# Altium PCB robotcar.PcbDoc (part 3 of 3)
Units mil, origin at the board's own origin, x right, y up, seen from the top; angles counter-clockwise.
Board outline 4050.03 x 1712.03 mil, 2 copper layers (Top Layer, Bottom Layer); 124 components, 123 nets, 485 pads, 136 vias.
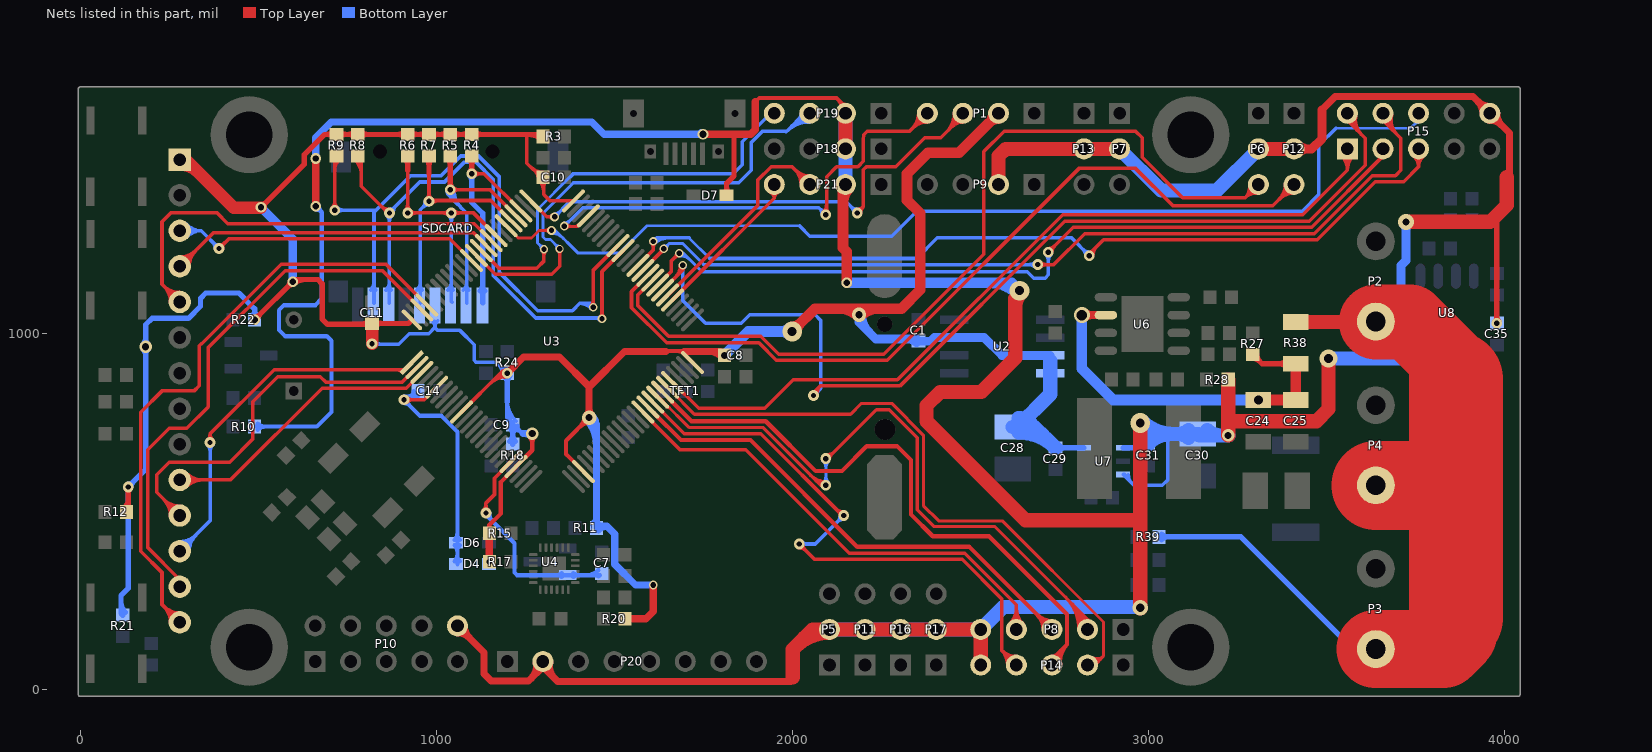
[diagram p3: the nets of this part, all layers, seen from the top]

## Via types
v1: diameter 30, hole 15, Top Layer to Bottom Layer, 73 vias
v2: diameter 23.62, hole 15, Top Layer to Bottom Layer, 11 vias
v3: diameter 35, hole 20, Top Layer to Bottom Layer, 8 vias
v4: diameter 24, hole 15, Top Layer to Bottom Layer, 7 vias
v5: diameter 25, hole 15, Top Layer to Bottom Layer, 7 vias
v6: diameter 30, hole 18, Top Layer to Bottom Layer, 6 vias
v7: diameter 45, hole 20, Top Layer to Bottom Layer, 4 vias
v8: diameter 55, hole 25, Top Layer to Bottom Layer, 4 vias
v9: diameter 43, hole 25, Top Layer to Bottom Layer, 3 vias
v10: diameter 40, hole 20, Top Layer to Bottom Layer, 3 vias
v11: diameter 23, hole 15, Top Layer to Bottom Layer, 3 vias
v12: diameter 32, hole 16, Top Layer to Bottom Layer, 1 vias
v13: diameter 30, hole 20, Top Layer to Bottom Layer, 1 vias
v14: diameter 50, hole 25, Top Layer to Bottom Layer, 1 vias
v15: diameter 27.56, hole 15, Top Layer to Bottom Layer, 1 vias
v16: diameter 25, hole 16, Top Layer to Bottom Layer, 1 vias
v17: diameter 45, hole 30, Top Layer to Bottom Layer, 1 vias
v18: diameter 30, hole 16, Top Layer to Bottom Layer, 1 vias

## Nets (pads, with @x,y where several pads share a name; then routed paths per layer and width w, separated by ;. In a path a pad name is that pad's centre, name@x,y a point inside that pad or via, vN(x,y) a via of type N, cw(c..) or ccw(c..) an arc to the next point about the centre after c; other vN are vias at no path point) (continued)
PC8: R8.2 SDCARD.7 U3.65 | length 1919.1
  Top Layer w10: R8.2@771.57,1490.59 cw(c727.09,1446.11) 790,1446.11 ; R8.2@778.65,1497.66 cw(c751.23,1470.25) 790,1470.25 ; R8.2@790,1490 790,1415 v1@863,1342 ; 845.1,1359.9 ccw(c869,1383.8) v1@869,1350 ; 854.76,1350.24 cw(c844.51,1340) v1@859,1340 ; v4@1461.05,1047.95 ccw(c1449.1,1059.9) 1466,1059.9 ccw(c1482.9,1059.9) v4@1470.95,1047.95 ; v4(1466,1043) 1466,1175.45 U3.65@1525.13,1234.58
  Bottom Layer w10: SDCARD.7@859.26,1123.03 ccw(c835.97,1146.32) 868.91,1146.32 ; v1@861.93,1332.93 cw(c845.08,1316.08) 868.91,1316.08 ; SDCARD.7@868.91,1086.93 v1@868.91,1331.09 ; 868.91,1136.44 ccw(c887.87,1136.44) SDCARD.7@874.46,1123.03 ; 868.91,1315.64 cw(c893.36,1315.64) v1@876.07,1332.93 ; v1@869,1350 ccw(c869,1369.31) 882.66,1355.66 ; v1@871,1337 871,1344 954,1427 1023.82,1427 1079.82,1483 1112,1483 1160,1435 1160,1165 1280,1045 v4@1460,1045 ; v1@879,1340 cw(c907.97,1340) 887.49,1360.49 ; 1444.27,1045 cw(c1444.27,1021.27) v4@1461.05,1038.05 ; 1453.93,1045 ccw(c1453.93,1055.07) v4@1461.05,1047.95
  other v1: 869,1340
PC9: R9.2 SDCARD.8 U3.66 | length 1991.4
  Top Layer w10: v1@707.93,1355.07 ccw(c690.86,1372.14) 715,1372.14 ccw(c739.14,1372.14) v1@722.07,1355.07 ; R9.2@709.61,1490.59 cw(c696.58,1477.57) 715,1477.57 ; v1(715,1348) R9.2@715,1495 ; 715,1458.18 cw(c760.84,1458.18) R9.2@728.43,1490.59 ; v4@1436.05,1079.95 ccw(c1424.1,1091.9) 1441,1091.9 ccw(c1457.9,1091.9) v4@1445.95,1079.95 ; v4(1441,1075) 1441,1178.29 U3.66@1511.21,1248.5
  Bottom Layer w10: v1(715,1348) 831,1348 ; v1@722.07,1340.93 cw(c739.14,1323.86) 739.14,1348 cw(c739.14,1372.14) v1@722.07,1355.07 ; SDCARD.8@815.83,1123.03 ccw(c792.54,1146.32) 825.48,1146.32 ; SDCARD.8@825.48,1086.93 825.48,1342.48 831,1348 ; 825.48,1136.44 ccw(c844.43,1136.44) SDCARD.8@831.03,1123.03 ; 1424.56,1086 cw(c1424.56,1062.1) v4@1443.36,1076.85 ; 1433,1086 1404,1086 ; v4@1435.49,1070.68 ccw(c1404,1045.98) 1404,1086 ; 831,1348 927,1444 1013,1444 1069,1500 1119.04,1500 1178,1441.04 1178,1172.9 1285.9,1065 1383,1065 1404,1086
PC10: R4.2 SDCARD.1 U3.78 | length 773.2
  Top Layer w10: v1(1100,1450) 1134.32,1450 U3.78@1238.39,1345.93 ; v1@1107.07,1442.93 cw(c1124.14,1425.86) 1124.14,1450 cw(c1124.14,1474.14) v1@1107.07,1457.07
  Top Layer w15: R4.2@1092.36,1492.36 cw(c1073.91,1473.91) 1100,1473.91 cw(c1126.09,1473.91) R4.2@1107.64,1492.36 ; v1@1094.7,1455.3 ccw(c1081.89,1468.11) 1100,1468.11 ccw(c1118.11,1468.11) v1@1105.3,1455.3 ; v1(1100,1450) R4.2@1100,1500
  Bottom Layer w15: v1@1094.7,1444.7 cw(c1081.89,1431.89) 1100,1431.89 cw(c1118.11,1431.89) v1@1105.3,1444.7 ; v1@1100,1445 1100,1370 1130.98,1339.02 SDCARD.1@1130.98,1086.93 ; SDCARD.1@1123.47,1120.98 ccw(c1105.34,1139.11) 1130.98,1139.11 ; 1130.98,1134.36 ccw(c1149.91,1134.36) SDCARD.1@1136.53,1120.98
PC11: R5.2 SDCARD.2 U3.79 | length 964.4
  Top Layer w10: v1(1040,1405) 1151.48,1405 U3.79@1224.47,1332.01 ; v1@1047.07,1397.93 cw(c1064.14,1380.86) 1064.14,1405 cw(c1064.14,1429.14) v1@1047.07,1412.07
  Top Layer w15: R5.2@1032.36,1492.36 cw(c1013.91,1473.91) 1040,1473.91 cw(c1066.09,1473.91) R5.2@1047.64,1492.36 ; v1@1034.7,1410.3 ccw(c1021.89,1423.11) 1040,1423.11 ccw(c1058.11,1423.11) v1@1045.3,1410.3 ; v1(1040,1405) R5.2@1040,1500
  Bottom Layer w10: v1@1030,1405 ccw(c1054.14,1405) 1037.07,1387.93 ; v1@1050,1405 ccw(c1122.43,1405) 1071.21,1353.79 ; 1054.14,1370.86 cw(c1088.28,1405) v1(1040,1405) 1040,1385 ; SDCARD.2@1076.41,1123.03 ccw(c1053.12,1146.32) 1086.06,1146.32 ; SDCARD.2@1086.06,1086.93 1086.06,1338.94 1040,1385 ; 1086.06,1136.44 ccw(c1105.02,1136.44) SDCARD.2@1091.61,1123.03 ; 1040,1385 cw(c1055,1385) 1046,1397 ccw(c1055,1385) 1040,1385 ; 1040,1385 ccw(c1025,1385) 1034,1397 cw(c1025,1385) 1040,1385
PC12: R7.2 SDCARD.5 U3.80 | length 882.7
  Top Layer w10: v1@972.93,1380.07 ccw(c955.86,1397.14) 980,1397.14 ccw(c1004.14,1397.14) 987.07,1380.07 ccw(c999.31,1392.31) 999.31,1375 ; v1(980,1373) 980,1450 ; v1@980,1375 1153.64,1375 U3.80@1210.55,1318.1 ; v1@987.07,1365.93 cw(c1008.97,1344.03) 1008.97,1375
  Top Layer w15: R7.2@972.36,1492.36 cw(c953.91,1473.91) 980,1473.91 cw(c1006.09,1473.91) R7.2@987.64,1492.36 ; 980,1450 R7.2@980,1500
  Bottom Layer w10: SDCARD.5@946.12,1123.03 ccw(c922.83,1146.32) 955.77,1146.32 ; SDCARD.5@955.77,1086.93 955.77,1348.77 v1(980,1373) v1@980,1383 ; 955.77,1136.44 ccw(c974.73,1136.44) SDCARD.5@961.32,1123.03 ; v1@970,1373 cw(c945.86,1373) 962.93,1355.93 cw(c980,1338.86) v1@980,1363
PD0: P15.6 U3.81 | length 2973
  Top Layer w8: U3.81@1196.63,1304.18 1230.81,1270 1268,1270 1289,1291 v5(1324,1291) ; v5@1317.99,1284.99 ccw(c1303.48,1270.48) 1303.48,1291 ccw(c1303.48,1311.52) v5@1317.99,1297.01
  Bottom Layer w8: v5@1324,1282.5 cw(c1324,1235.42) 1357.29,1268.71 ; v5@1324,1290.5 cw(c1324,1262.74) 1343.63,1282.37 ; v5(1324,1291) 1335,1291 1398,1228 1516,1228 1592,1304 2021,1304 ; 3528,1578 3738,1578 P15.6@3760,1600 ; 3750.56,1590.56 cw(c3760,1581.13) P15.6@3760,1594.47
  Bottom Layer w10: 2021,1304 2050,1275 2280,1275 2350,1345 3433.32,1345 3480,1391.68 3480,1530 3528,1578
PD2: R6.2 SDCARD.3 U3.83 | length 958
  Top Layer w10: v1@912.93,1347.07 ccw(c895.86,1364.14) 920,1364.14 ccw(c944.14,1364.14) 927.07,1347.07 ccw(c944.14,1364.14) 944.14,1340 ccw(c944.14,1315.86) v1@927.07,1332.93 ; 920,1460 v1(920,1340) 1105.13,1340 U3.83@1168.79,1276.34 ; v1@1035.93,1332.93 ccw(c1018.86,1315.86) 1018.86,1340 ccw(c1018.86,1364.14) v1@1035.93,1347.07 ; v1@1050.07,1332.93 cw(c1067.14,1315.86) 1067.14,1340 cw(c1067.14,1364.14) v1@1050.07,1347.07
  Top Layer w15: R6.2@912.36,1492.36 cw(c893.91,1473.91) 920,1473.91 cw(c946.09,1473.91) R6.2@927.64,1492.36 ; 920,1460 R6.2@920,1500
  Bottom Layer w10: SDCARD.3@1032.98,1123.03 ccw(c1008.79,1147.22) 1043,1147.22 ; v1@1035.93,1332.93 cw(c1018.86,1315.86) 1043,1315.86 cw(c1067.14,1315.86) v1@1050.07,1332.93 ; 1043,1135.54 ccw(c1060.69,1135.54) SDCARD.3@1048.18,1123.03 ; v1(1043,1340) 1043,1091.3 SDCARD.3@1045,1089.3
PD3: TFT1.5 U3.84 | length 1376.1
  Top Layer w10: TFT1.5@253.5,1090 ccw(c189.54,1090) 234.77,1135.23 ccw(c280,1180.46) TFT1.5@280,1116.5 ; TFT1.5@263.5,1090 ccw(c223.68,1090) 251.84,1118.16 ccw(c280,1146.32) TFT1.5@280,1106.5 ; TFT1.5@280,1090 230,1140 230,1315 255,1340 385,1340 415,1310 1107.29,1310 U3.84@1154.87,1262.42
PD4: TFT1.4 U3.85 | length 1078.5
  Top Layer w10: TFT1.4@280,1190 375,1285 1104.45,1285 U3.85@1140.95,1248.5 ; TFT1.4@280,1206.5 ccw(c280,1246.32) 308.16,1218.16 ccw(c336.32,1190) TFT1.4@296.5,1190 ; TFT1.4@280,1216.5 ccw(c280,1280.46) 325.23,1235.23 ccw(c370.46,1190) TFT1.4@306.5,1190
PD5: P19.4 U3.86 | length 1227.9
  Top Layer w10: U3.86@1127.03,1234.58 1176.61,1185 1283,1185 1303,1205 v2(1303,1238) ; v2@1298.18,1233.18 cw(c1286.56,1221.56) 1303,1221.56 cw(c1319.44,1221.56) v2@1307.82,1233.18
  Bottom Layer w8: v2@1295.19,1238 ccw(c1276.33,1238) 1289.67,1251.33 ccw(c1303,1264.67) v2@1303,1245.81 ; v2(1303,1238) 1285,1256 1285,1350 1377.02,1442.02
  Bottom Layer w10: 1377.02,1442.02 1377.49,1442.02 1384.52,1449.05 1384.52,1449.52 1385,1450 1835,1450 1860,1475 1860,1540 P19.4@1940,1620
  Bottom Layer w12: P19.4@1940,1620 P19.4@1950,1620
PD6: P19.3 U3.87 | length 1592.6
  Top Layer w10: U3.87@1113.11,1220.66 1165.77,1168 1325,1168 1347,1190 v11(1347,1239) ; v11@1342.4,1234.4 cw(c1331.31,1223.31) 1347,1223.31 cw(c1362.69,1223.31) v11@1351.6,1234.4
  Bottom Layer w8: v11@1339.5,1239 ccw(c1321.39,1239) 1334.2,1251.8 ccw(c1347,1264.61) v11@1347,1246.5 ; v11(1347,1239) 1321,1265 1307,1265 1300,1272 1300,1339 1386,1425
  Bottom Layer w10: 1386,1425 1850,1425 1885,1460 1885,1538.13 1916.87,1570 1985.06,1570 P19.3@2035.06,1620 ; 1982.62,1567.56 cw(c2050,1500.18) P19.3@2050,1595.47 ; 1999.69,1584.63 cw(c2050,1534.32) P19.3@2050,1605.47 ; 2016.76,1601.7 cw(c2050,1568.46) P19.3@2050,1615.47 ; 2018.7,1603.64 ccw(c2002.34,1620) P19.3@2025.47,1620
  Bottom Layer w12: P19.3@2035.06,1620 P19.3@2050,1620
PD7: TFT1.3 U3.88 | length 1100.3
  Top Layer w10: v1(390,1240) 418,1268 1037.93,1268 U3.88@1099.19,1206.74 ; v1@390,1250 ccw(c390,1274.14) 407.07,1257.07 ccw(c424.14,1240) v1@400,1240
  Bottom Layer w10: TFT1.3@280,1290 340,1290 ; TFT1.3@292.19,1278.89 cw(c317.35,1255.96) 317.35,1290 cw(c317.35,1324.04) TFT1.3@292.19,1301.11 ; TFT1.3@299.58,1272.15 cw(c340,1235.32) 340,1290 ; TFT1.3@299.58,1307.85 ccw(c340,1344.68) 340,1290 ; v1@380,1240 ccw(c355.86,1240) 372.93,1257.07 ccw(c390,1274.14) v1@390,1250 ; v1(390,1240) 340,1290
PD8: P21.4 U3.55 | length 484.9
  Top Layer w10: U3.55@1664.32,1095.38 1950,1381.06 ; P21.4@1939.41,1397.88 cw(c1931.36,1381.06) 1950,1381.06 ; P21.4@1950,1420 1950,1381.06 ; P21.4@1960.59,1397.88 ccw(c1968.64,1381.06) 1950,1381.06
PD9: P21.3 U3.56 | length 759.9
  Top Layer w10: U3.56@1650.4,1109.3 1652.37,1109.3 1904,1360.94 1904,1432.73 1941.27,1470 2000,1470 P21.3@2050,1420 ; P21.3@2025.47,1420 ccw(c1966.26,1420) 2008.13,1461.87 ccw(c2050,1503.74) P21.3@2050,1444.53 ; P21.3@2035.47,1420 ccw(c2000.4,1420) 2025.2,1444.8 ccw(c2050,1469.6) P21.3@2050,1434.53
PD10: P15.2 U3.57 | length 3122.2
  Top Layer w10: U3.57@1636.48,1123.22 1693,1179.74 ; 1672,1158.74 ccw(c1637.73,1193) v2@1686.19,1193 ; 1689.07,1175.81 ccw(c1671.88,1193) v2@1696.19,1193 ; v2@1689.03,1187.46 cw(c1683.5,1179.74) 1693,1179.74 ; v2(1693,1193) 1693,1179.74 ; v2@1696.97,1187.46 ccw(c1702.5,1179.74) 1693,1179.74 ; v1(2060,827) 2060,835 2079,854 ; v1@2069.94,828.12 cw(c2101.35,831.65) 2079,854 ; P15.2@3560,1600 3610,1550 3610,1473.97 3453.03,1317 2766.04,1317 2303.04,854 2079,854 ; P15.2@3564.42,1619.03 ccw(c3599.61,1611.33) 3574.14,1585.86 ; P15.2@3574.19,1616.89 ccw(c3620.82,1606.69) 3587.07,1572.93 ; P15.2@3583.96,1614.75 ccw(c3642.04,1602.04) 3600,1560
  Bottom Layer w10: v2@1688.18,1188.18 cw(c1676.56,1176.56) 1693,1176.56 cw(c1709.44,1176.56) v2@1697.82,1188.18 ; v2(1693,1193) 1693,1094 1757,1030 1857,1030 1881,1054 2065,1054 2080,1039 2080,847 v1(2060,827) ; v1@2060,837 ccw(c2060,861.14) 2077.07,844.07 ccw(c2094.14,827) v1@2070,827
PD11: P15.3 U3.58 | length 2502.4
  Top Layer w10: U3.58@1622.14,1137.14 U3.58@1622.56,1137.14 1661,1175.58 1661,1205 v2(1683,1227) ; v2@1676.19,1227 cw(c1659.75,1227) 1671.37,1215.37 cw(c1683,1203.75) v2@1683,1220.19 ; v1(2720,1230) 2790,1300 3460.07,1300 3660,1499.93 P15.3@3660,1500 ; v1@2720,1240 ccw(c2720,1264.14) 2737.07,1247.07 ccw(c2754.14,1230) v1@2730,1230
  Bottom Layer w8: v2@1682.87,1227.14 cw(c1688.86,1220.64) 1695.11,1226.89 ; v2@1683,1219.19 cw(c1683,1171.36) 1716.82,1205.18 ; v2(1683,1227) 1695,1227 ; v2@1683,1227.19 cw(c1683,1198.67) 1703.16,1218.84 ; v2@1688.3,1221.26 cw(c1694.51,1214.51) 1701,1221 ; v2@1690.14,1223.84 cw(c1695,1221.69) 1695,1227 ; v2@1690.14,1230.16 ccw(c1695,1232.31) 1695,1227 ; 1747,1175 1695,1227
  Bottom Layer w10: 1747,1175 2644,1175 2661,1175 2679,1157 2711,1157 2720,1166 v1(2720,1230) ; v1@2712.93,1222.93 cw(c2695.86,1205.86) 2720,1205.86 cw(c2744.14,1205.86) v1@2727.07,1222.93
PD12: P6.3 U3.59 | length 2564.3
  Top Layer w10: U3.59@1608.64,1151.06 1566,1108.42 1566,1081 1653.08,993.92 1912.12,993.92 1963.04,943 2257.68,943 2538.47,1223.79 2538.47,1512.47 2596,1570 2965,1570 2983.81,1551.19 2983.81,1496.19 3097,1383 3273,1383 ; P6.3@3285.57,1417.76 cw(c3242.21,1413.79) 3273,1383 ; P6.3@3295.53,1418.68 cw(c3269.85,1416.32) 3288.09,1398.09 cw(c3306.32,1379.85) P6.3@3308.68,1405.53 ; P6.3@3307.76,1395.57 ccw(c3303.79,1352.21) 3273,1383 ; P6.3@3310,1420 3273,1383
PD13: P12.3 U3.60 | length 2472
  Top Layer w10: U3.60@1594.72,1164.98 1549,1119.26 1549,1073.96 1647.96,975 1907,975 1956,926 2266.96,926 2805.96,1465 2965,1465 3070,1360 3350,1360 P12.3@3410,1420 ; P12.3@3385.47,1420 cw(c3326.26,1420) 3368.13,1378.13 cw(c3410,1336.26) P12.3@3410,1395.47 ; P12.3@3395.47,1420 cw(c3360.4,1420) 3385.2,1395.2 cw(c3410,1370.4) P12.3@3410,1405.47
PD14: P15.4 U3.61 | length 2730.1
  Top Layer w10: U3.61@1580.81,1178.9 v2@1640.45,1238.55 ; 1627.73,1225.83 ccw(c1614.56,1239) v2@1633.19,1239 ; 1629.92,1228.01 cw(c1640,1217.93) v2@1640,1232.19 ; v1(2690,1195) 2735,1195 2822,1282 3467,1282 3630,1445 3695,1445 3710,1460 3710,1550 P15.4@3660,1600 ; v1@2697.07,1187.93 cw(c2714.14,1170.86) 2714.14,1195 cw(c2714.14,1219.14) v1@2697.07,1202.07 ; P15.4@3664.42,1619.03 ccw(c3699.61,1611.33) 3674.14,1585.86 ; P15.4@3674.19,1616.89 ccw(c3720.82,1606.69) 3687.07,1572.93 ; P15.4@3683.96,1614.75 ccw(c3742.04,1602.04) 3700,1560
  Bottom Layer w8: v2(1640,1239) 1655,1254 1693,1254 1752,1195 ; v2@1640,1246.81 ccw(c1640,1265.67) 1653.33,1252.33 ccw(c1666.67,1239) v2@1647.81,1239
  Bottom Layer w10: 1752,1195 v1(2690,1195) ; v1@2682.93,1187.93 ccw(c2665.86,1170.86) 2665.86,1195 ccw(c2665.86,1219.14) v1@2682.93,1202.07
PD15: P15.5 U3.62 | length 2719
  Top Layer w10: U3.62@1566.89,1192.82 1610,1235.93 v2(1610,1260) ; v2@1605.18,1255.18 cw(c1593.56,1243.56) 1610,1243.56 cw(c1626.44,1243.56) v2@1614.82,1255.18 ; v1(2835,1220) 2835,1225 2875,1265 3475,1265 3638,1428 3718,1428 3760,1470 ; v1@2835,1230 ccw(c2835,1242.07) 2843.54,1233.54 ; v1@2845,1220 cw(c2881.21,1220) 2855.61,1245.61 ; P15.5@3744.99,1500.6 cw(c3721.31,1470) 3760,1470 ; P15.5@3751.11,1508.51 cw(c3737.08,1490.39) 3760,1490.39 cw(c3782.92,1490.39) P15.5@3768.89,1508.51 ; P15.5@3760,1500 3760,1470 ; P15.5@3775.01,1500.6 ccw(c3798.69,1470) 3760,1470
  Bottom Layer w8: 1710.82,1270 1768.82,1212
  Bottom Layer w10: v2@1607.75,1262.25 cw(c1626.44,1243.56) 1626.44,1270 ; v2(1610,1260) 1620,1270 1710.82,1270 ; v2@1614.82,1255.18 cw(c1650.59,1219.41) 1650.59,1270 ; 1768.82,1212 2350.08,1212 2408.08,1270 2785,1270 v1(2835,1220) ; v1@2825,1220 ccw(c2800.86,1220) 2817.93,1237.07 ccw(c2835,1254.14) v1@2835,1230
PE0: TFT1.14 U3.97 | length 1887.9
  Top Layer w10: TFT1.14@253.5,190 ccw(c189.54,190) 234.77,235.23 ccw(c280,280.46) TFT1.14@280,216.5 ; TFT1.14@263.5,190 ccw(c223.68,190) 251.84,218.16 ccw(c280,246.32) TFT1.14@280,206.5 ; TFT1.14@280,190 230,240 230,330 170,390 170,780 230,840 320,840 335,855 335,967 341,973 342.04,973 565.04,1196 859.39,1196 U3.97@973.92,1081.47
PE1: TFT1.13 U3.98 | length 1544.2
  Top Layer w10: TFT1.13@280,290 280,310 190,400 190,675 250,735 300,735 360,795 360,962 576,1178 849.55,1178 U3.98@960,1067.55
PE2: TFT1.12 U3.1 | length 1273.1
  Top Layer w10: v1@357.93,702.07 ccw(c340.86,719.14) 365,719.14 ccw(c389.14,719.14) v1@372.07,702.07 ; v1(365,695) 365,720 545,900 912.16,900 U3.1@932.16,920 ; 887.96,900 cw(c887.96,875.8) U3.1@905.07,892.91
  Bottom Layer w10: TFT1.12@280,390 365,475 v1(365,695) ; TFT1.12@280,406.5 ccw(c280,446.32) 308.16,418.16 ccw(c336.32,390) TFT1.12@296.5,390 ; TFT1.12@280,416.5 ccw(c280,480.46) 325.23,435.23 ccw(c370.46,390) TFT1.12@306.5,390 ; v1@357.93,687.93 cw(c340.86,670.86) 365,670.86 cw(c389.14,670.86) v1@372.07,687.93
PE3: TFT1.11 U3.2 | length 1234.7
  Top Layer w10: TFT1.11@253.5,490 ccw(c189.54,490) 234.77,535.23 ccw(c280,580.46) TFT1.11@280,516.5 ; TFT1.11@263.5,490 ccw(c223.68,490) 251.84,518.16 ccw(c280,546.32) TFT1.11@280,506.5 ; TFT1.11@280,490 215,555 215,605 250,640 420,640 485,705 485,810 555,880 674.96,880 689.96,865 905,865 U3.2@946.08,906.08
PE4: TFT1.10 U3.3 | length 968.2
  Top Layer w10: TFT1.10@280,590 421.82,590 679.82,848 915.84,848 U3.3@960,892.16 ; TFT1.10@291.66,578.34 cw(c319.82,550.18) 319.82,590 cw(c319.82,629.82) TFT1.10@291.66,601.66 ; TFT1.10@298.74,571.26 cw(c343.97,526.03) 343.97,590 cw(c343.97,653.97) TFT1.10@298.74,608.74
PE9: P8.4 U3.40 | length 1463.1
  Top Layer w10: U3.40@1600,760 1685,675 1766.82,675 1767.03,675.22 1869.78,675.22 2161,384 2485.04,384 2630,239.04 P8.4@2630,170 ; P8.4@2612.66,187.34 ccw(c2570.79,229.21) 2630,229.21 ccw(c2689.21,229.21) P8.4@2647.34,187.34 ; P8.4@2619.73,180.27 ccw(c2594.93,205.07) 2630,205.07 ccw(c2665.07,205.07) P8.4@2640.27,180.27
PE10: P8.3 U3.41 | length 1458.4
  Top Layer w12: U3.41@1612.5,777.5 1688,702 1883,702 2183,402 2498,402 P8.3@2730,170 ; P8.3@2706.47,170 ccw(c2649.67,170) 2689.84,210.16 ccw(c2730,250.33) P8.3@2730,193.53
PE11: P14.4 U3.42 | length 1960.2
  Top Layer w10: U3.42@1608.64,808.64 1697.29,720 1911.67,720 2141.67,490 v1(2145,490) ; v1@2020,400 cw(c2020,375.86) 2037.07,392.93 cw(c2054.14,410) v1@2030,410 ; v1(2020,410) 2063,367 2478,367 2588.47,256.53 2588.47,111.53 ; 2122.24,509.43 ccw(c2145,532.19) v1@2145,500 ; 2130.29,501.38 cw(c2118.91,490) v1@2135,490 ; P14.4@2605.47,70.14 ccw(c2547.44,70.49) 2588.47,111.53 ; P14.4@2615.47,70.09 ccw(c2581.1,70.29) 2605.4,94.6 ccw(c2629.71,118.9) P14.4@2629.91,84.53 ; P14.4@2629.86,94.53 cw(c2629.51,152.56) 2588.47,111.53 ; P14.4@2630,70 2588.47,111.53
  Bottom Layer w10: v1(2020,410) 2065,410 v1(2145,490) ; v1@2027.07,402.93 cw(c2044.14,385.86) 2044.14,410 cw(c2044.14,434.14) v1@2027.07,417.07 ; v1@2135,490 cw(c2110.86,490) 2127.93,472.93 cw(c2145,455.86) v1@2145,480
PE12: P8.2 U3.43 | length 2369.2
  Top Layer w9: U3.43@1622.56,822.56 1625.79,822.56 1638.75,809.6 1638.75,809 1710.25,737.5 1917.5,737.5 2080,575 v1(2095,575) ; U3.43@1649.01,794.71 cw(c1649.01,784.99) 1655.89,791.86 ; 2051.47,603.53 ccw(c2095,647.06) v1@2095,585.5 ; 2066.83,588.17 ccw(c2095,616.33) v1@2095,576.5 ; v1@2095,660.5 ccw(c2095,697.92) 2121.46,671.46 ; v1@2105,655 2237,787 2273,787 2351.5,708.5 2351.5,506.5 2399,459 2570,459 2830,199 P8.2@2830,170 ; v1@2105.5,650 cw(c2118.78,650) 2109.39,659.39 ; 2766.77,262.23 cw(c2674.54,170) P8.2@2804.97,170 ; 2782.13,246.87 cw(c2705.27,170) P8.2@2813.97,170 ; 2797.5,231.5 cw(c2735.99,170) P8.2@2822.97,170 ; 2812.86,216.14 cw(c2766.72,170) P8.2@2831.97,170 ; 2828.23,200.77 cw(c2797.45,170) P8.2@2840.97,170
  Bottom Layer w9: v1@2087.58,582.42 ccw(c2069.65,600.35) 2095,600.35 ccw(c2120.35,600.35) v1@2102.42,582.42 ; v1@2087.58,642.58 cw(c2069.65,624.65) 2095,624.65 cw(c2120.35,624.65) v1@2102.42,642.58 ; v1(2095,575) v1(2095,650)
PE13: P14.3 U3.44 | length 1792.7
  Top Layer w12: U3.44@1656.25,816.25 1717.5,755 1926.25,755 2066.25,615 2140,615 2210,685 2295,685 2334,646 2334,493 2395,432 2553,432 2772.53,212.47 2772.53,127.47 2730,84.94 P14.3@2730,70 ; P14.3@2730,93.53 ccw(c2730,114.25) 2744.65,99.6 ; P14.3@2741.45,71.3 cw(c2788.18,76.62) 2754.93,109.87 ; P14.3@2753.38,72.66 cw(c2819.79,80.21) 2772.52,127.47
PE14: P14.2 U3.45 | length 1878.9
  Top Layer w9: U3.45@1660,840 1725.5,774.5 2164.5,774.5 2195,805 2280,805 2369,716 2369,518 2412,475 2591,475 2875,191 2875,95 ; P14.2@2830,70 2850,70 2875,95 ; P14.2@2833.69,75.98 ccw(c2844.45,93.38) 2858.92,78.92 ; P14.2@2838.43,83.63 ccw(c2850.59,103.32) 2866.96,86.96 ; P14.2@2843.16,91.29 ccw(c2856.73,113.26) 2875,95 ; P14.2@2855.03,70 cw(c2867.17,70) 2858.58,78.58
PE15: P15.1 U3.46 | length 2391.3
  Top Layer w10: U3.46@1664.32,864.32 1737.64,791 1923.08,791 2003.08,871 2296,871 2760,1335 3205,1335 3435,1335 3560,1460 P15.1@3560,1500 ; P15.1@3542.66,1502.66 cw(c3500.79,1460.79) 3560,1460.79 cw(c3619.21,1460.79) P15.1@3577.34,1502.66 ; P15.1@3549.73,1509.73 cw(c3524.93,1484.93) 3560,1484.93 cw(c3595.07,1484.93) P15.1@3570.27,1509.73
SWCLK: P1.3 U3.76 | length 1694.4
  Top Layer w10: U3.76@1266.23,1373.77 1311,1329 v5(1333,1329) ; v5@1327.7,1323.7 ccw(c1314.89,1310.89) 1314.89,1329 ccw(c1314.89,1347.11) v5@1327.7,1334.3 ; v1(2183,1340) 2200,1357 ; v1@2183.03,1350 ccw(c2183.1,1373.9) 2200,1357 ; v1@2193,1340.03 cw(c2216.9,1340.1) 2200,1357 ; 2433.18,1566.18 ccw(c2379.36,1620) P1.3@2455.47,1620 ; 2450.08,1583.08 cw(c2480,1553.16) P1.3@2480,1595.47 ; 2450.25,1583.25 ccw(c2413.5,1620) P1.3@2465.47,1620 ; P1.3@2480,1620 2480,1613 2418,1551 2372.47,1551 2291.47,1470 2209.04,1470 2200,1460.96 2200,1357
  Bottom Layer w10: v5(1333,1329) 1376,1372 2151,1372 2171.5,1351.5 ; v5@1333,1336.5 ccw(c1333,1354.61) 1345.8,1341.8 ccw(c1358.61,1329) v5@1340.5,1329 ; v1@2173,1340 ccw(c2148.86,1340) 2165.93,1357.07 ccw(c2183,1374.14) v1@2183,1350
SWDIO: P1.4 U3.72 | length 1650.2
  Top Layer w8: v5@1360,1302 1397.68,1302 U3.72@1427.69,1332.01 ; v5@1366.01,1296.99 cw(c1378.11,1284.89) 1378.11,1302 ; v5@1366.01,1309.01 ccw(c1382.93,1325.94) 1382.93,1302 ; 1388.03,1302 ccw(c1388.03,1318.78) U3.72@1399.9,1306.91
  Top Layer w10: v1@2087.93,1342.07 ccw(c2065.75,1364.25) 2097.12,1364.25 ; v1(2095,1335) 2097.12,1337.12 2097.12,1442.12 2125,1470 2185,1470 2200,1485 2200,1546.03 2201,1559.89 2211.1,1570 2330,1570 P1.4@2380,1620 ; 2097.12,1354.03 ccw(c2114.03,1354.03) v1@2102.07,1342.07 ; P1.4@2355.47,1620 cw(c2296.26,1620) 2338.13,1578.13 cw(c2380,1536.26) P1.4@2380,1595.47 ; P1.4@2365.47,1620 cw(c2330.4,1620) 2355.2,1595.2 cw(c2380,1570.4) P1.4@2380,1605.47
  Bottom Layer w10: v5(1360,1303) 1412,1355 2075,1355 v1(2095,1335) ; v5@1360,1310.5 ccw(c1360,1328.61) 1372.8,1315.8 ccw(c1385.61,1303) v5@1367.5,1303 ; v1@2085,1335 ccw(c2060.86,1335) 2077.93,1352.07 ccw(c2095,1369.14) v1@2095,1345
VBAT: C14.2 D4.2 D6.2 U3.6 | length 1017.7
  Top Layer w10: v1(910,815) 966.36,815 U3.6@1001.76,850.4 ; v1@917.07,807.93 cw(c934.14,790.86) 934.14,815 cw(c934.14,839.14) v1@917.07,822.07
  Bottom Layer w12: v1@909.95,812 ccw(c910.4,839.24) 929.66,819.98 ; v1@910,806 cw(c910,784.27) 925.36,799.64 cw(c940.73,815) v1@919,815 ; v1@910.15,824 ccw(c911.04,878.64) C14.2@949.68,840 924.68,815 v1(910,815) 955,770 1015,770 1060,725 D4.2@1060,353 ; 927,817.31 cw(c949.68,794.62) C14.2@949.68,826.71 ; 929.37,819.69 ccw(c910.04,839.02) C14.2@937.38,839.02 ; D4.2@1051.58,361.31 ccw(c1031.25,381.64) 1060,381.64 ; D6.2@1051.58,406.69 cw(c1031.25,386.36) 1060,386.36 ; D6.2@1051.58,421.31 ccw(c1031.25,441.64) 1060,441.64 ; 1060,376.28 ccw(c1081.17,376.28) D4.2@1066.2,361.31 ; 1060,391.72 cw(c1081.17,391.72) D6.2@1066.2,406.69 ; 1060,436.28 ccw(c1081.17,436.28) D6.2@1066.2,421.31
VCC3V3: C1.1 C8.1 C9.1 C10.1 C11.1 C28.1 C29.2 D4.1 P1.2 R3.1 R4.1 R5.1 R6.1 R7.1 R8.1 R9.1 R11.1 R12.2 R15.1 R17.1 R18.1 R20.2 R21.2 R22.2 R24.2 SDCARD.4 TFT1.1 U2.3 U2.7 U2.8 U3.11 U3.22 U3.28 U3.50 U3.75 U3.100 U7.5 | length 12488.5
  Top Layer w10: U3.11@1071.36,780.81 1180.23,889.68 ; 1149.19,858.64 cw(c1200,807.82) v1@1200,879.68 ; 1166.26,875.71 cw(c1200,841.97) v1(1200,889.68) ; 1170.35,879.8 cw(c1183.28,866.88) v1@1194.09,881.62 ; 1178.6,888.05 cw(c1190.25,876.39) v1(1200,889.68) ; 1183.33,892.78 cw(c1200,876.11) v1@1200,899.68 ; v1@1191.94,883.76 ccw(c1180.24,875.15) 1180.24,889.68 ; v1@1191.94,895.61 cw(c1180.24,904.22) 1180.24,889.68 ; 1255,1560.63 1255,1480 1295,1440 C10.1@1299.68,1440 ; 1267.29,1467.71 ccw(c1299.68,1500.1) C10.1@1299.68,1454.29 ; 1280.98,1454.02 cw(c1267.94,1440.98) C10.1@1286.38,1440.98 ; C10.1@1290.28,1429.61 cw(c1261.97,1401.3) 1302,1401.3 ; 1302,1412.48 cw(c1326.22,1412.48) C10.1@1309.09,1429.61 ; C10.1@1309.68,1440 1302,1432.31 1302,1392 1320.23,1373.77 U3.75@1385.93,1373.77 ; 1180.23,889.68 v1(1200,889.68)
  Top Layer w12: R15.1@1142.86,451.22 ccw(c1134.78,463.34) 1149.34,463.34 ; R15.1@1149.34,440 1149.34,463.34 ; R15.1@1156.02,451.54 cw(c1163.1,463.34) 1149.34,463.34 ; U3.22@1224.47,627.69 1270,673.22 v3(1270,720) ; U3.22@1224.47,628.8 1224.47,626.59 1182,584.12 1182,496 1149.34,463.34 ; v3@1261.87,711.87 cw(c1242.24,692.24) 1270,692.24 cw(c1297.76,692.24) v3@1278.13,711.87 ; U3.28@1413.77,613.77 1365,662.55 1365,700 v10(1430,765) ; v10@1416,765 cw(c1382.2,765) 1406.1,741.1 cw(c1430,717.2) v10@1430,751 ; 1647,952 1688,952 U3.50@1720,920 ; 1680.37,952 cw(c1680.37,933.27) U3.50@1693.62,946.51
  Top Layer w15: R12.2@122.67,508.63 ccw(c92.91,538.39) 135,538.39 ; v1@129.7,564.7 cw(c116.89,551.89) 135,551.89 cw(c153.11,551.89) v1@140.3,564.7 ; R12.2@135,504.68 v1(135,570) ; v6(490.32,1040) 603.32,1153 668,1153 680,1141 680,1042 695,1027 817.32,1027 C11.1@820,1029.69 922.14,1029.69 U3.100@931.65,1039.2 ; v6@490.32,1047.5 ccw(c490.32,1065.61) 503.12,1052.8 ccw(c515.92,1040) v6@497.82,1040 ; v6@508,1355 630,1477 630,1504 686.63,1560.63 R3.1@1296,1560.63 ; v6@508,1363.5 ccw(c508,1384.02) 522.51,1369.51 ; v6@515.5,1356 cw(c531.19,1356) 520.1,1367.1 ; v6@589.88,1147.06 cw(c571.77,1147.06) 584.58,1134.26 cw(c597.38,1121.46) v6@597.38,1139.56 ; v6@602.68,1141.76 cw(c629.82,1114.63) 629.82,1153 ; R9.1@711.37,1552.99 ccw(c692.93,1534.54) 692.93,1560.63 ccw(c692.93,1586.72) R9.1@711.37,1568.27 ; R9.1@728.63,1552.99 cw(c747.07,1534.54) 747.07,1560.63 cw(c747.07,1586.72) R9.1@728.63,1568.27 ; R8.1@771.37,1552.99 ccw(c752.93,1534.54) 752.93,1560.63 ccw(c752.93,1586.72) R8.1@771.37,1568.27 ; 786.44,1027 ccw(c786.44,1062.26) C11.1@811.37,1037.33 ; R8.1@788.63,1552.99 cw(c807.07,1534.54) 807.07,1560.63 cw(c807.07,1586.72) R8.1@788.63,1568.27 ; 799.41,1027 cw(c799.41,1010.08) C11.1@811.37,1022.04 ; C11.1@828.63,1022.04 cw(c847.07,1003.59) 847.07,1029.69 cw(c847.07,1055.78) C11.1@828.63,1037.33 ; R6.1@911.37,1552.99 ccw(c892.93,1534.54) 892.93,1560.63 ccw(c892.93,1586.72) R6.1@911.37,1568.27 ; R6.1@928.63,1552.99 cw(c947.07,1534.54) 947.07,1560.63 cw(c947.07,1586.72) R6.1@928.63,1568.27 ; R7.1@971.37,1552.99 ccw(c952.93,1534.54) 952.93,1560.63 ccw(c952.93,1586.72) R7.1@971.37,1568.27 ; R7.1@988.63,1552.99 cw(c1007.07,1534.54) 1007.07,1560.63 cw(c1007.07,1586.72) R7.1@988.63,1568.27 ; R5.1@1031.37,1552.99 ccw(c1012.93,1534.54) 1012.93,1560.63 ccw(c1012.93,1586.72) R5.1@1031.37,1568.27 ; R5.1@1048.63,1552.99 cw(c1067.07,1534.54) 1067.07,1560.63 cw(c1067.07,1586.72) R5.1@1048.63,1568.27 ; R4.1@1091.37,1552.99 ccw(c1072.93,1534.54) 1072.93,1560.63 ccw(c1072.93,1586.72) R4.1@1091.37,1568.27 ; R4.1@1108.63,1552.99 cw(c1127.07,1534.54) 1127.07,1560.63 cw(c1127.07,1586.72) R4.1@1108.63,1568.27 ; 1262.38,1560.63 cw(c1262.38,1518.68) R3.1@1292.04,1548.34
  Top Layer w20: R17.1@1143.81,366.86 ccw(c1130.47,380.2) 1149.34,380.2 ; R15.1@1143.81,433.14 cw(c1130.47,419.8) 1149.34,419.8 ; R17.1@1149.34,362.88 R15.1@1149.34,440 ; 1149.34,381.88 ccw(c1170.58,381.88) R17.1@1155.56,366.86 ; 1149.34,418.12 cw(c1170.58,418.12) R15.1@1155.56,433.14 ; v1(1200,889.68) 1245.32,935 1347,935 1430,852 ; v10@1422.93,772.07 ccw(c1405.86,789.14) 1430,789.14 ccw(c1454.14,789.14) v10@1437.07,772.07 ; v10(1430,765) 1430,852 ; R20.2@1530.32,200 1590,200 1610,220 v16(1610,295) ; R20.2@1536.19,194.13 cw(c1550.37,179.94) 1550.37,200 cw(c1550.37,220.06) R20.2@1536.19,205.87 ; 1645,951 1529,951 1430,852 ; U3.50@1696,951 1799,951 v3(1810,940) ; 1765.34,951 cw(c1765.34,895.34) C8.1@1804.7,934.7 ; 1765.45,951 cw(c1765.45,896.75) C8.1@1803.81,935.11 ; C8.1@1809.68,940 C8.1@1815,945.31
  Top Layer w30: v8@2000,1019.5 ccw(c2000,1049.68) 2021.34,1028.34 ccw(c2042.68,1007) v8@2012.5,1007 ; v8@2004.5,1017.5 2010.5,1017.5 2064.23,1071.23 2307.23,1071.23 2360,1124 2360,1339 2323,1376 2323,1450 2382,1509 2469,1509 P1.2@2580,1620 ; 2134.34,1071.23 cw(c2134.34,1000.34) v10@2184.46,1050.46 ; v10@2191.54,1050.46 cw(c2241.66,1000.34) 2241.66,1071.23 ; P1.2@2565.47,1620 cw(c2530.4,1620) 2555.2,1595.2 cw(c2580,1570.4) P1.2@2580,1605.47
  Top Layer w35: TFT1.1@280,1476 cw(c280,1403.59) 331.21,1454.79 ; TFT1.1@280,1490 296,1490 431,1355 v6@508,1355 ; v1(820,973) C11.1@820,1029.69
  Bottom Layer w10: v1(820,973) 822,971 895,971 925,1001 979.12,1001 996.56,1018.44 ; v1@827.07,965.93 cw(c839.31,953.69) 839.31,971 ; v1@827.07,980.07 ccw(c848.97,1001.97) 848.97,971 ; SDCARD.4@989.55,1036.97 cw(c972.62,1020.04) 996.56,1020.04 ; SDCARD.4@996.56,1035.94 996.56,1018.44 ; SDCARD.4@1004.49,1036.72 ccw(c1021.61,1018.43) 996.56,1018.43 ; 1175.6,914.08 cw(c1151.21,889.68) R24.2@1185.71,889.68 ; 1177.98,911.71 ccw(c1199.02,932.74) R24.2@1199.02,902.99 ; R24.2@1189.61,880.28 cw(c1166.93,857.6) 1199,857.6 ; R24.2@1190,889.68 ccw(c1165.86,889.68) 1182.93,906.76 ccw(c1200,923.83) R24.2@1200,899.68 ; R24.2@1192.93,882.61 cw(c1178.27,867.96) 1199,867.96 ; 1199,769.21 ccw(c1238.54,769.21) C9.1@1210.58,741.25 ; 1199,793.36 ccw(c1262.69,793.36) C9.1@1217.65,748.32 ; 1199,817.5 ccw(c1286.83,817.5) C9.1@1224.72,755.39 ; 1199,857.52 cw(c1231.18,857.52) R24.2@1208.43,880.28 ; 1199,863.13 cw(c1226.56,863.13) R24.2@1207.07,882.61 ; C9.1@1215.32,730.71 cw(c1215.32,687.31) 1246,718 ; C9.1@1228.62,744.02 ccw(c1249.48,744.02) 1234.73,729.27 ; 1244,720 1199,765 1199,888.68 v1(1200,889.68) 1169.68,920 1112.96,920 1106.96,926 1106.96,970.04 1067,1010 1005,1010 996.56,1018.44
  Bottom Layer w15: 115,246.1 ccw(c154.8,246.1) R21.2@126.66,217.96 ; R21.2@120,210.32 115,215.32 115,265 135,285 v1(135,570) 184,619 184,1026 202,1044 304,1044 338,1078 338,1100 353,1115 446,1115 490.32,1070.68 v6(490.32,1040) ; v1@129.7,564.7 cw(c116.89,551.89) 135,551.89 cw(c153.11,551.89) v1@140.3,564.7 ; v1@135,577.5 ccw(c135,595.61) 147.8,582.8 ccw(c160.61,570) v1@142.5,570 ; v3@176.93,956.93 cw(c159.86,939.86) 184,939.86 cw(c208.14,939.86) v3@191.07,956.93 ; v3@176.93,971.07 ccw(c159.86,988.14) 184,988.14 ccw(c208.14,988.14) v3@191.07,971.07 ; R22.2@482.67,1048.63 ccw(c464.22,1067.07) 490.32,1067.07 ccw(c516.41,1067.07) R22.2@497.96,1048.63 ; R22.2@485.01,1045.3 ccw(c472.21,1058.11) 490.32,1058.11 ccw(c508.42,1058.11) R22.2@495.62,1045.3 ; R24.2@1192.36,882.04 cw(c1173.91,863.59) 1200,863.59 cw(c1226.09,863.59) R24.2@1207.64,882.04 ; R24.2@1194.7,884.38 cw(c1181.89,871.58) 1200,871.58 cw(c1218.11,871.58) R24.2@1205.3,884.38 ; 1200,810 v1(1200,889.68) ; R18.1@1207.36,697.96 ccw(c1188.91,716.41) 1215,716.41 ccw(c1241.09,716.41) R18.1@1222.64,697.96 ; C9.1@1207.67,736.37 cw(c1189.98,718.69) 1215,718.69 ; R18.1@1215,690.31 1215,744.69 C9.1@1215.32,745 ; 1215,717.16 cw(c1242.17,717.16) C9.1@1222.96,736.37 ; C29.2@2748.63,672.67 cw(c2766.31,654.98) 2766.31,680 ; C29.2@2748.63,687.96 ccw(c2767.84,707.17) 2767.84,680 ; C29.2@2750.32,680 U7.5@2820,680
  Bottom Layer w20: 1244,720 v3(1270,720) ; v3@1264.7,714.7 ccw(c1251.89,701.89) 1251.89,720 ccw(c1251.89,738.11) v3@1264.7,725.3 ; v10@1422.93,757.93 cw(c1356.81,691.81) 1450.31,691.81 ; v10@1430,755 cw(c1430,730.86) 1447.07,747.93 cw(c1464.14,765) v10@1440,765 ; v10(1430,765) 1450.31,744.69 R11.1@1450.31,460 ; v10@1437.07,772.07 cw(c1405.1,740.1) 1450.31,740.1 ; R11.1@1444.44,461.86 ccw(c1430.26,476.04) 1450.31,476.04 ccw(c1470.37,476.04) R11.1@1456.19,461.86 ; R11.1@1445,470 1455,460 1480,460 ; R11.1@1456.2,450.12 cw(c1480,426.39) 1480,460 ; v16(1610,295) 1560,295 1501.88,353.12 1501.88,438.12 1480,460
  Bottom Layer w25: v6(508,1356) 597.38,1266.62 v6(597.38,1147.06) ; v10(2188,1054) 2188,1033 2235,986 C1.1@2348.68,986 ; v10@2195.5,1054 ccw(c2264.31,1054) 2215.65,1005.35 ; 2324.75,986 cw(c2324.75,950.42) C1.1@2349.91,975.58 ; C1.1@2355,979.69 2389.68,979.69 2400,990 2540,990 2590.06,939.94 U2.7@2725,939.94
  Bottom Layer w30: v3(1810,940) 1877,1007 v8(2000,1007) ; v8@1991.16,998.16 ccw(c1969.82,976.82) 1969.82,1007 ccw(c1969.82,1037.18) v8@1991.16,1015.84
  Bottom Layer w40: C28.1@2620,739.06 2681.26,739.06 C29.2@2740,680.31 ; C28.1@2633.06,739.06 2725,831 2725,924 ; C28.1@2635.75,723.62 cw(c2635.75,576.49) C29.2@2739.79,680.53 ; C28.1@2635.75,763.62 cw(c2635.75,713.06) 2671.5,748.81 ; C28.1@2642.99,725.43 cw(c2667.33,679.62) 2704.01,716.3 ; C28.1@2646.66,728.14 cw(c2673.01,701.8) 2673.01,739.06 cw(c2673.01,776.31) C28.1@2646.66,749.97 ; C28.1@2651.18,739.06 cw(c2694.94,739.06) C28.1@2664,770
  other v2: 1149.69,360
  other v3: 184,964
VCC5V: C30.1 C31.1 C35.1 D7.2 P5.2 P6.2 P7.2 P8.5 P9.2 P10.10 P11.2 P12.2 P13.2 P14.5 P15.10 P16.2 P17.2 P18.2 P19.2 P20.2 P21.2 R10.1 R28.2 U7.1 U7.3 U8.8 | length 14732.8
  Top Layer w10: 1897,1651.81 1908.19,1663 2125,1663 2150,1638 P19.2@2150,1620 ; 2127.54,1660.46 cw(c2102.51,1635.42) P19.2@2136.18,1624.49 ; 2138.86,1649.14 ccw(c2150,1660.29) P19.2@2150,1644.53 ; 2139.08,1648.92 cw(c2119.93,1629.76) P19.2@2145.69,1621.4
  Top Layer w15: D7.2@1810.21,1396.25 ccw(c1796.22,1410.24) 1816,1410.24 ; 1816,1412.44 ccw(c1838.9,1412.44) D7.2@1822.71,1396.25 ; D7.2@1816.46,1390 1816,1390.46 1816,1423 1837,1444 1837,1561.13 ; v18@3974.7,1035.62 ccw(c3961.89,1048.42) 3980,1048.42 ccw(c3998.11,1048.42) v18@3985.3,1035.62 ; v18(3980,1030.31) 3980,1334 3985.92,1339.92
  Top Layer w20: v6(662,1359) v6(662,1493) ; P10.10@1060,160.47 cw(c1060,113.33) 1093.34,146.66 cw(c1126.67,180) P10.10@1079.53,180 ; P10.10@1060,180 1134.53,105.47 1134.53,45.47 1155,25 1260,25 1300,65 1341.53,23.47 1996.47,23.47 2008,35 ; 1267.5,32.5 ccw(c1233.12,66.89) P20.2@1280.84,76.24 ; P20.2@1319.27,76.84 ccw(c1371.34,68.28) 1334.03,30.97 ; P12.2@3400,1510 P12.2@3410,1520 ; 3489,1630 3526,1667 3913,1667 4015.5,1564.5 4015.5,1428 ; P15.10@3940.47,1620 ccw(c3893.33,1620) 3926.66,1653.34 ccw(c3960,1686.67) P15.10@3960,1639.53 ; P15.10@3960,1600.47 cw(c3960,1553.33) 3993.34,1586.66 cw(c4026.67,1620) P15.10@3979.53,1620
  Top Layer w21: v13(1749.67,1561.13) 1884.13,1561.13 1897,1574 1897,1651.81
  Top Layer w25: P12.2@3410,1520 3460,1520 3489,1549 3489,1630 ; P12.2@3422.04,1507.96 cw(c3451.11,1478.89) 3451.11,1520 cw(c3451.11,1561.11) P12.2@3422.04,1532.04
  Top Layer w30: 2143,1368.03 cw(c2201.97,1368.03) P21.2@2160.27,1409.73 ; P21.2@2150,1420 2143,1413 2143,1242 2154,1231 v6(2154,1144)
  Top Layer w40: 2002,36 2002,114 2058,170 P8.5@2530,170 P14.5@2530,70 ; 2008.5,120.5 cw(c2105,24) P5.2@2105,160.47 ; 2034.5,146.5 cw(c2079.41,101.59) P5.2@2101.66,161.08 ; P18.2@2150,1520 P19.2@2150,1620 ; P9.2@2580,1420 2580,1500 2600,1520 P7.2@2920,1520 ; 2627,1074.92 cw(c2686.08,1074.92) v8@2644.3,1116.7 ; v8@2643,1116 2627,1100 2627,932.6 2531.4,837 2416,837 2378,799 2378,755 2656,477 2978,477 ; v9@2978,229 v8(2978,750) ; v3(3225,715) R28.2@3225,871.68 ; 3225.32,755 3473,755 3507,789 v14(3507,931) ; P6.2@3310,1520 P12.2@3410,1520 ; v7(3725,1315) 3961,1315 3980,1334 ; 3985.92,1339.92 4008,1362 4008,1440
  Bottom Layer w10: U7.3@2930.24,605.2 2960.43,575 3040,575 3055,590 3055,719.06 ; U7.3@2934.92,605.41 ccw(c2945.95,605.08) 2938.15,597.28 ; U7.3@2944.92,605.11 ccw(c2977.75,604.13) 2954.53,580.91
  Bottom Layer w12: R10.1@490.31,740 665,740 706,781 706,981 693,994 576,994 559,1011 559,1067 573,1081 661,1081 679,1099 679,1342 v6(662,1359) ; R10.1@499.02,731.3 cw(c520.03,710.29) 520.03,740 cw(c520.03,769.71) R10.1@499.02,748.7 ; v6@662,1350 cw(c662,1328.27) 677.36,1343.64 cw(c692.73,1359) v6@671,1359
  Bottom Layer w15: U7.1@2930.24,680 C31.1@2989.68,680 ; U7.1@2948.02,680 ccw(c2948.02,741.31) C31.1@2991.37,697.96
  Bottom Layer w20: v6(662,1493) 662,1552 705,1595 1438,1595 1472,1561 1740.46,1561 1744.86,1565.4 1745.4,1565.4 v13(1749.67,1561.13) ; C30.1@3119.06,719.06 C30.1@3140,719.06
  Bottom Layer w25: v7@3717.93,1307.93 cw(c3700.86,1290.86) 3725,1290.86 cw(c3749.14,1290.86) v7@3732.07,1307.93 ; v7(3725,1315) 3725,1207 3711,1193 3711,1109 3765,1055 U8.8@3765,929
  Bottom Layer w30: v6(2154,1144) 2617,1144 v8(2639,1122) ; 2555.71,1144 cw(c2555.71,1038.71) v8@2630.16,1113.16
  Bottom Layer w40: P5.2@2105,170 P8.5@2530,170 2593,233 2976,233 v9(2978,231) ; P21.2@2150,1420 P19.2@2150,1620 ; P13.2@2820,1520 P7.2@2920,1520 3037,1403 3193,1403 P6.2@3310,1520 P12.2@3410,1520 ; v8@2974.56,753.44 cw(c2911.44,690.31) C31.1@3000.71,690.31 ; v8(2978,750) 3008.94,719.06 C30.1@3140,719.06 ; v8@2983.3,755.3 ccw(c3070.81,842.81) 3070.81,719.06 ; C31.1@2999.79,691.51 cw(c3066.28,625.02) 3066.28,719.06 ; C30.1@3113.34,708.14 ccw(c3086.99,681.8) 3086.99,719.06 ccw(c3086.99,756.31) C30.1@3113.34,729.97 ; C30.1@3144.06,715 v3(3225,715) ; C30.1@3166.66,729.97 ccw(c3202.8,766.1) 3202.8,715 ; v14(3507,931) U8.8@3763,931
VCC12V: C24.2 C25.2 R27.2 R38.1 U6.2 | length 1226.9
  Top Layer w15: R27.2@3294,942.68 3320.35,916.34 R38.1@3415,916.34 ; R27.2@3294.98,931.88 cw(c3294.98,908.16) R27.2@3311.75,924.93 ; R27.2@3305.79,942.68 ccw(c3334.26,942.68) 3314.13,922.56 ; R38.1@3391.39,905.91 ccw(c3366.22,880.74) 3366.22,916.34 ccw(c3366.22,951.93) R38.1@3391.39,926.76
  Top Layer w23: v17(2814,1053) U6.2@2881.64,1053 ; v17@2821.78,1045.22 cw(c2840.56,1026.44) 2840.56,1053 cw(c2840.56,1079.56) v17@2821.78,1060.78
  Top Layer w30: v9(3309.76,814.72) C25.2@3414.76,814.72 ; C25.2@3415,814.97 R38.1@3415,916.34
  Bottom Layer w30: v17(2814,1053) 2814,903 2902.28,814.72 v9(3309.76,814.72)
VCC_BAT: P2.2 P3.2 P4.2 R38.2 R39.2 | length 2623
  Top Layer w40: R38.2@3424,1033.66 3641.34,1033.66 P2.2@3646,1029 ; 3556.74,1033.66 ccw(c3556.74,1118.26) P2.2@3616.56,1058.44 ; 3563.2,1033.66 cw(c3563.2,958.2) P2.2@3616.56,1011.56
  Top Layer w80: P2.2@3640,1035 P2.2@3641.34,1033.66
  Top Layer w210: P2.2@3641.34,1033.66 3734.34,1033.66 3871,897
  Top Layer w220: P3.2@3640,115 3829,115 3871,157
  Top Layer w250: P4.2@3640,575 3871,575
  Top Layer w265: 3865,203 3865,873
  Bottom Layer w15: R39.2@3030.32,430 3261,430 3576,115 ; R39.2@3037.96,422.36 cw(c3056.41,403.91) 3056.41,430 cw(c3056.41,456.09) R39.2@3037.96,437.64 ; P3.2@3596.84,100.14 ccw(c3576,92.96) 3576,115 ; P3.2@3596.84,129.86 cw(c3576,137.04) 3576,115 ; P3.2@3640,115 3576,115
VREF+: C7.2 U3.21 U4.2 | length 787.8
  Top Layer w10: v1@1132.93,504.07 ccw(c1115.86,521.14) 1140,521.14 ccw(c1164.14,521.14) v1@1147.07,504.07 ; v1(1140,497) 1140,525 1164,549 1164,595.06 U3.21@1210.55,641.61
  Bottom Layer w12: v1(1140,497) 1140,492 1220,412 1220,330 1227.4,322.6 U4.2@1369.21,322.6 C7.2@1460.63,322.6 ; v1@1149,497 ccw(c1182.8,497) 1158.9,473.1 ; U4.2@1352.88,317.1 ccw(c1339.6,303.82) 1339.6,322.6 ccw(c1339.6,341.38) U4.2@1352.88,328.1 ; U4.2@1385.54,317.1 cw(c1398.82,303.82) 1398.82,322.6 cw(c1398.82,341.38) U4.2@1385.54,328.1 ; 1422.92,322.6 ccw(c1422.92,369.25) C7.2@1455.9,336.26 ; C7.2@1446.87,322.6 cw(c1446.87,309.82) C7.2@1455.9,318.86
pads on no net: BAT1.0 SDCARD.9 SDCARD.11 SDCARD.12 SW3.2@174.83,1600.39 U5.2 U5.3 U5.4 U5.5 U5.6 U5.7 U5.14 U5.15 U5.16 U5.17 U5.19 U5.21 USB1.4 Y1.3 Y1.4 Y2.2 Y2.4

## Polygon pours and split planes (outlines as drawn)
GND on Top Layer "Top Layer-No Net" (solid, remove dead copper, pour order 1000): 1.32,1687.74 4041.32,1687.74 4041.32,-14.26 1.32,-14.26
GND on Bottom Layer "Top Layer-No Net" (solid, remove dead copper, pour order 1001): 4038.4,1690.5 -1.6,1690.5 -1.6,-11.5 4038.4,-11.5

## Keep-outs
Keep-Out Layer:
  lines w10: 0,998.77 0,1130 0,1689 4040,1689 4040,-13 0,-13 0,1005

## Silkscreen, mask and mechanical layers (free items; w line width, h text height)
Top Overlay:
  lines w10: 2.99,1756 3.01,1776 ; 62.99,1745.96 3,1766 ; 63.01,1785.96 3,1766 ; 1637.62,1764.79 3,1766 ; 2409.38,1764.21 4044,1763 ; 3983.99,1743.04 4044,1763 ; 3984.01,1783.04 4044,1763 ; 4043.99,1753 4044.01,1773 ; 4274,35 4294,-25 ; 4274,1628 4294,1688 ; 4284,-25 4304,-25 ; 4284,1688 4304,1688 ; 4294,560.58 4294,-25 ; 4294,1102.42 4294,1688 ; 4314,35 4294,-25 ; 4314,1628 4294,1688
  text "4041.001 (mil)" at 1647.59,1728.79 h60 r359.96
  text "1713 (mil)" at 4329.99,570.58 h60 r90
Top Solder:
  lines w10: 2144,1642 2144,1643
  lines w20: 1296,60 1296,70 ; 2529,70 2530,70 ; 2978,216 2978,231
  lines w30: 3734,1314 3736,1312 3964,1312 4009,1357 4009,1427 ; 3960,1599 3960,1600
  lines w40: 3164.69,869.69 3164.69,872 ; 3225,715 3225.32,715.32
  lines w80: 3640,575 3832,575 3836,579
  lines w150: 3640,1035 3764,1035 3892,907 3892,263 ; 3655,114 3890,114 3890,245
Bottom Solder:
  lines w20: 3410,1620 3412,1620
  lines w40: 2814,1053 2814,898 2896,816 3100,816 ; 3049,816 3050.28,814.72 3309.76,814.72
  lines w60: 3640,340 3566,340 3537,369 3537,772 3570,805 3643,805
  lines w80: 3414.76,697.4 3414.76,1120.76 3554,1260 3640,1260

## Text inside footprints (layer, text, board x,y; h text height)
P10: Top Overlay "2" at 575,185 h55; Top Overlay "1" at 580,60 h55; Top Overlay "9" at 1120,60 h55; Top Overlay "10" at 1120,160 h55
P15: Top Overlay "10" at 3880,1420 h55; Top Overlay "9" at 3960,1420 h55; Top Overlay "1" at 3490,1500 h55; Top Overlay "2" at 3480,1605 h55
USB1: Top Overlay "USB" at 1598,1579 h55